# Altium PCB UpperAviPower.PcbDoc
Units mil, origin at the board's own origin, x right, y up, seen from the top; angles counter-clockwise.
Board outline 1868.64 x 1540 mil, 4 copper layers (Top Layer, GND, Layer 2, Bottom Layer), stack 23.756 mil thick; 9 components, 6 nets, 25 pads, 5 vias.
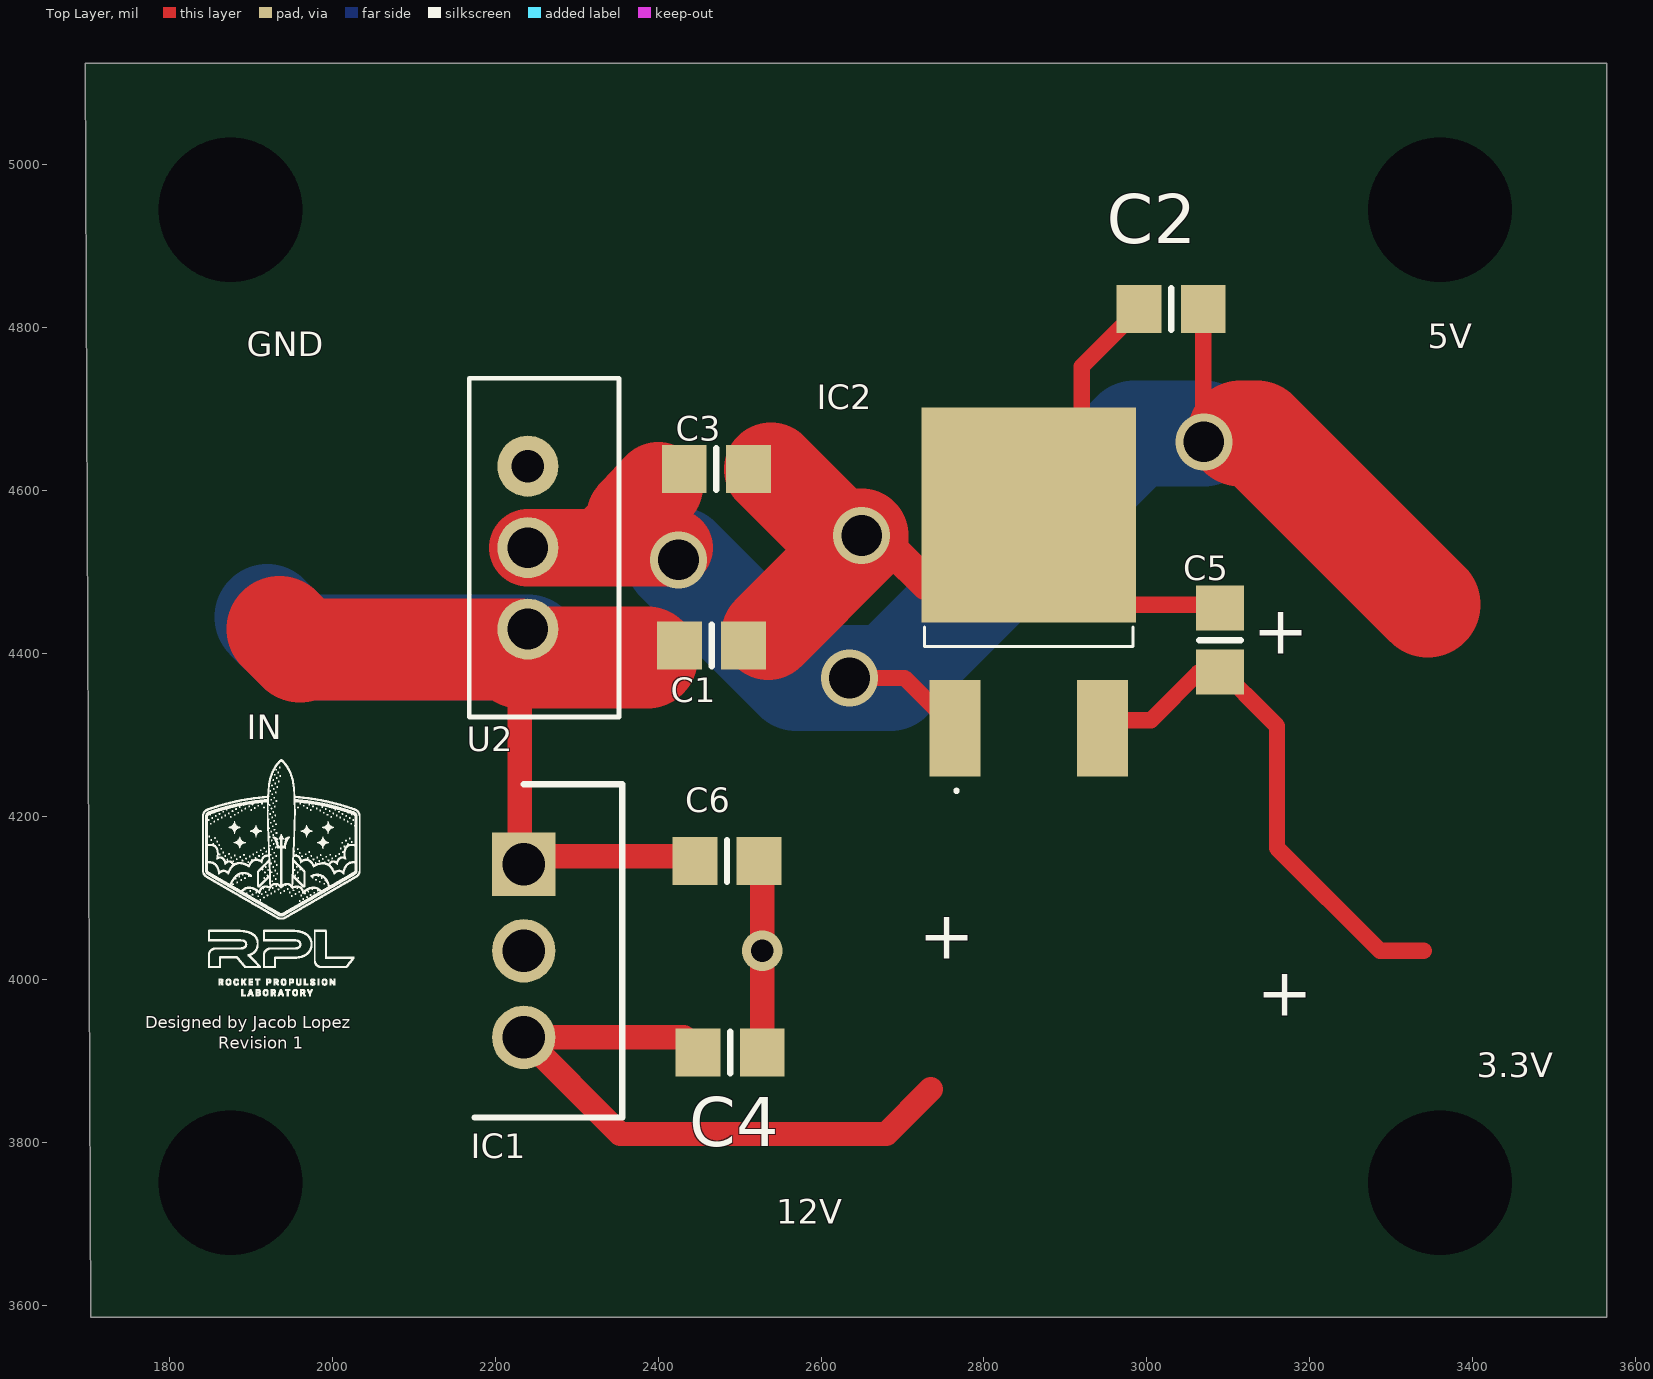
[diagram p0: Top Layer view]
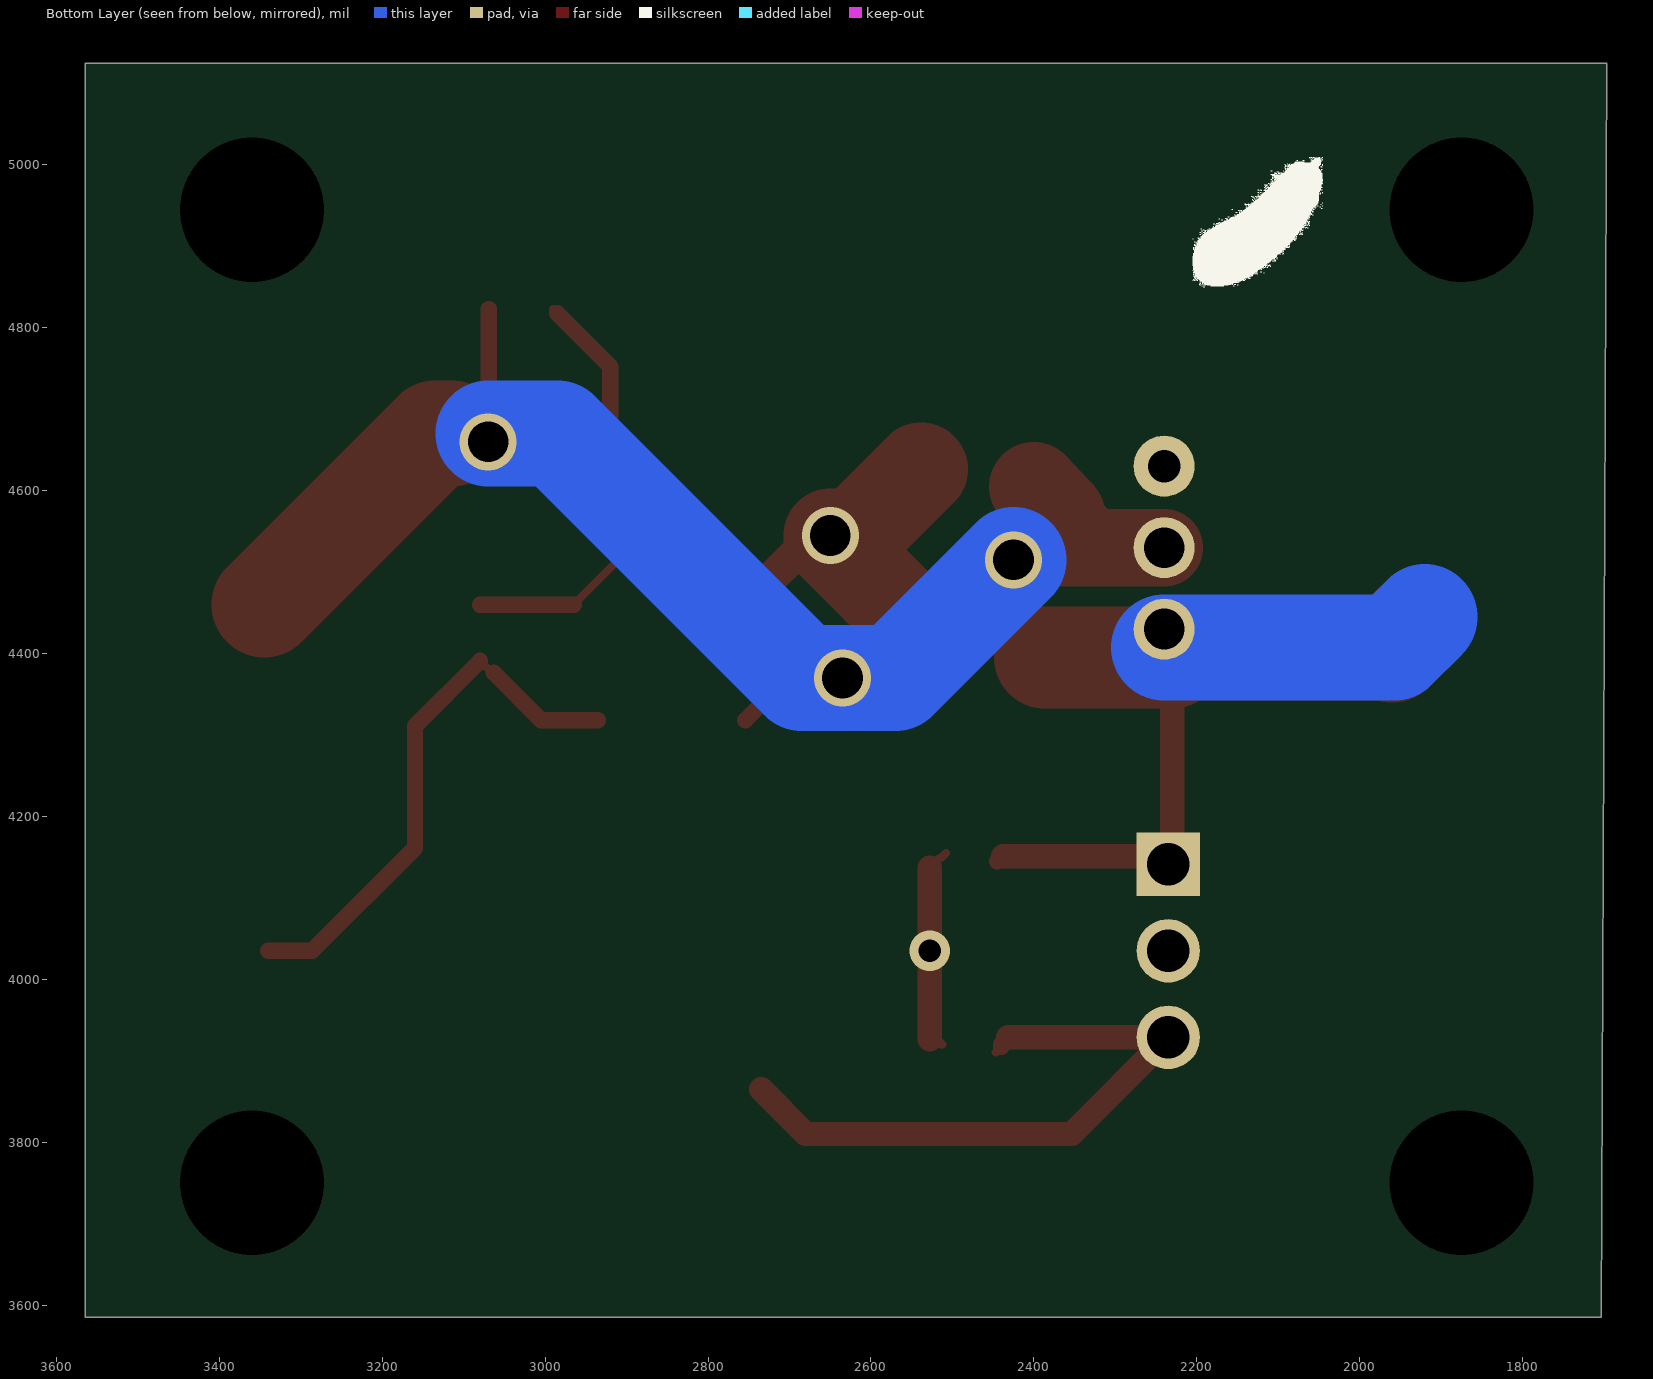
[diagram p1: Bottom Layer view, seen from below]
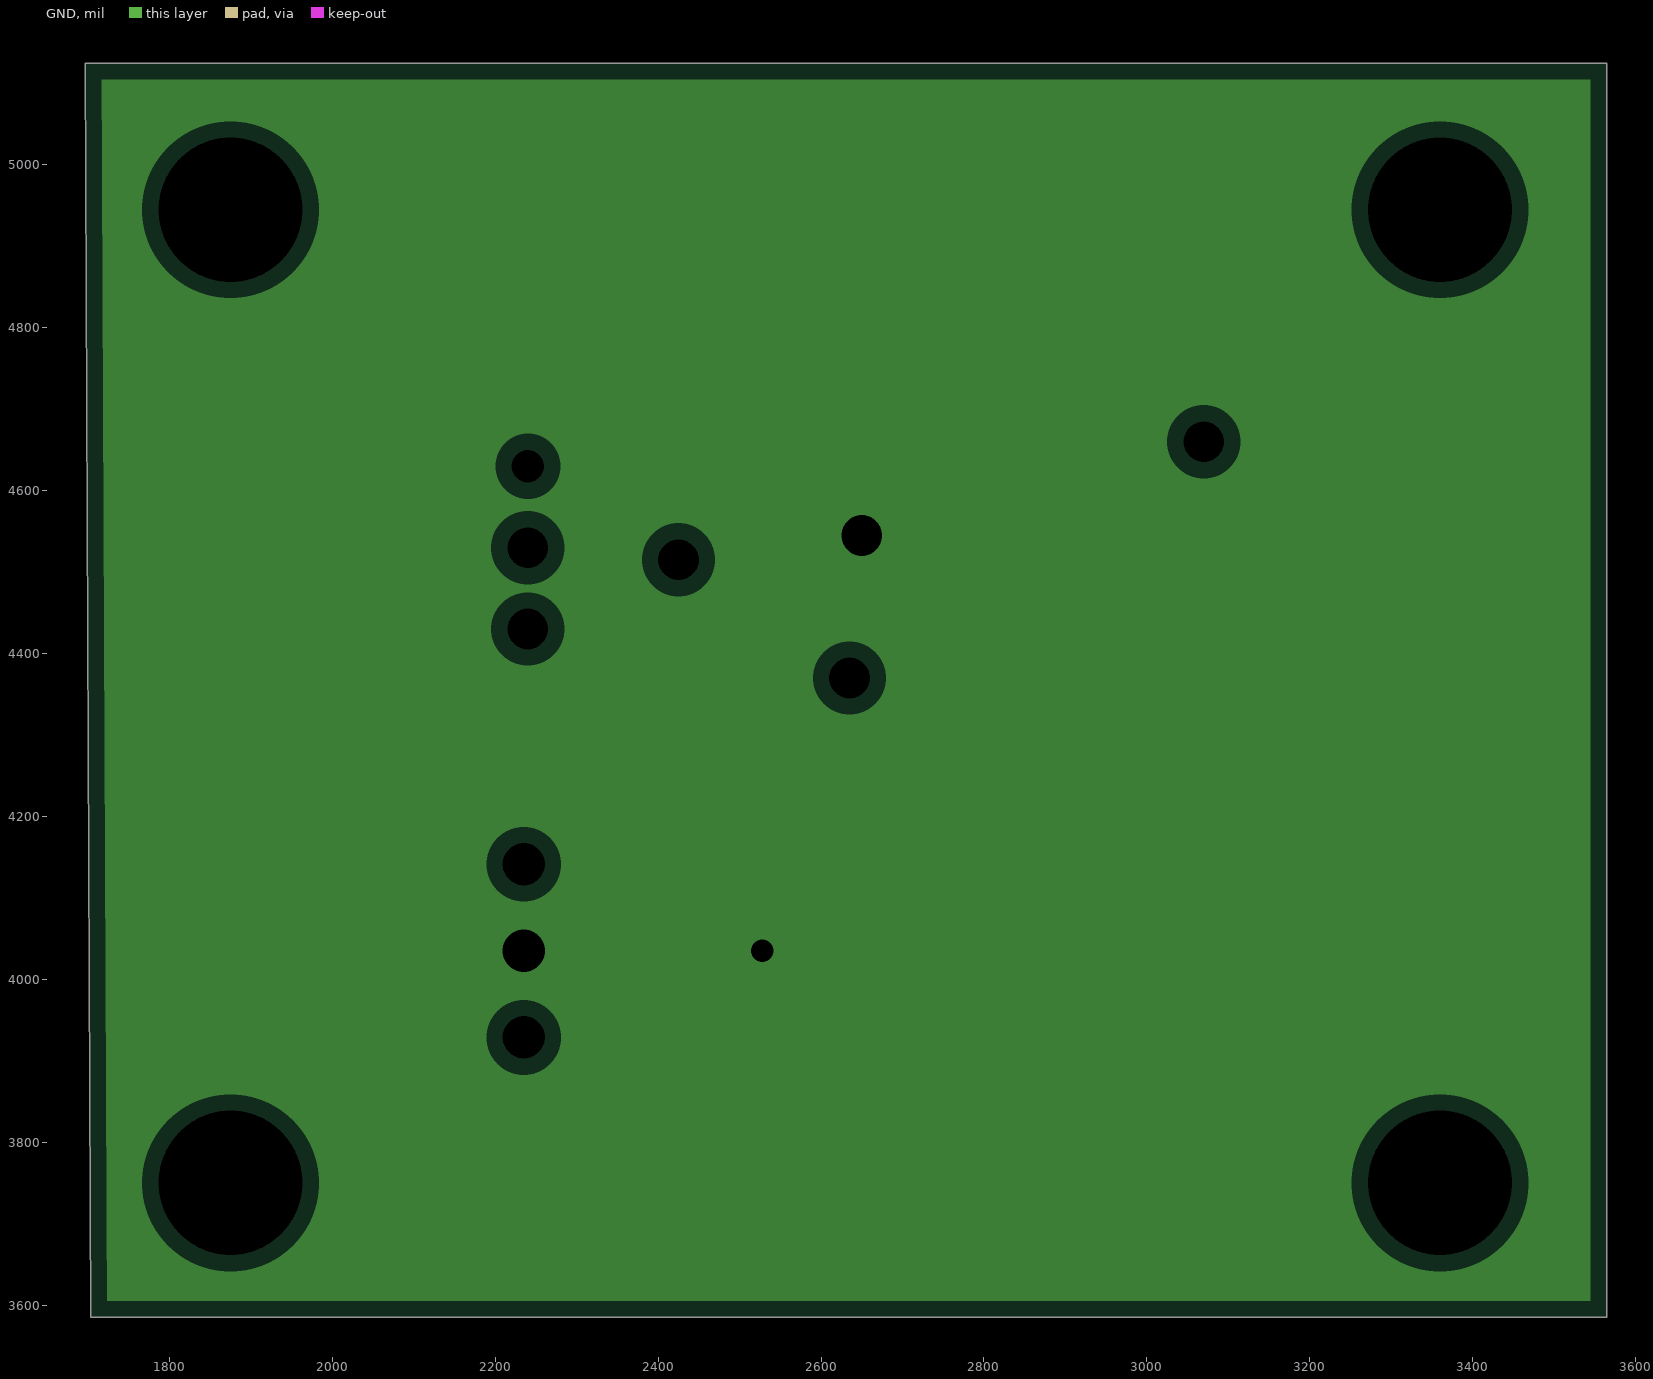
[diagram p2: GND, clearances drawn from the general rule]
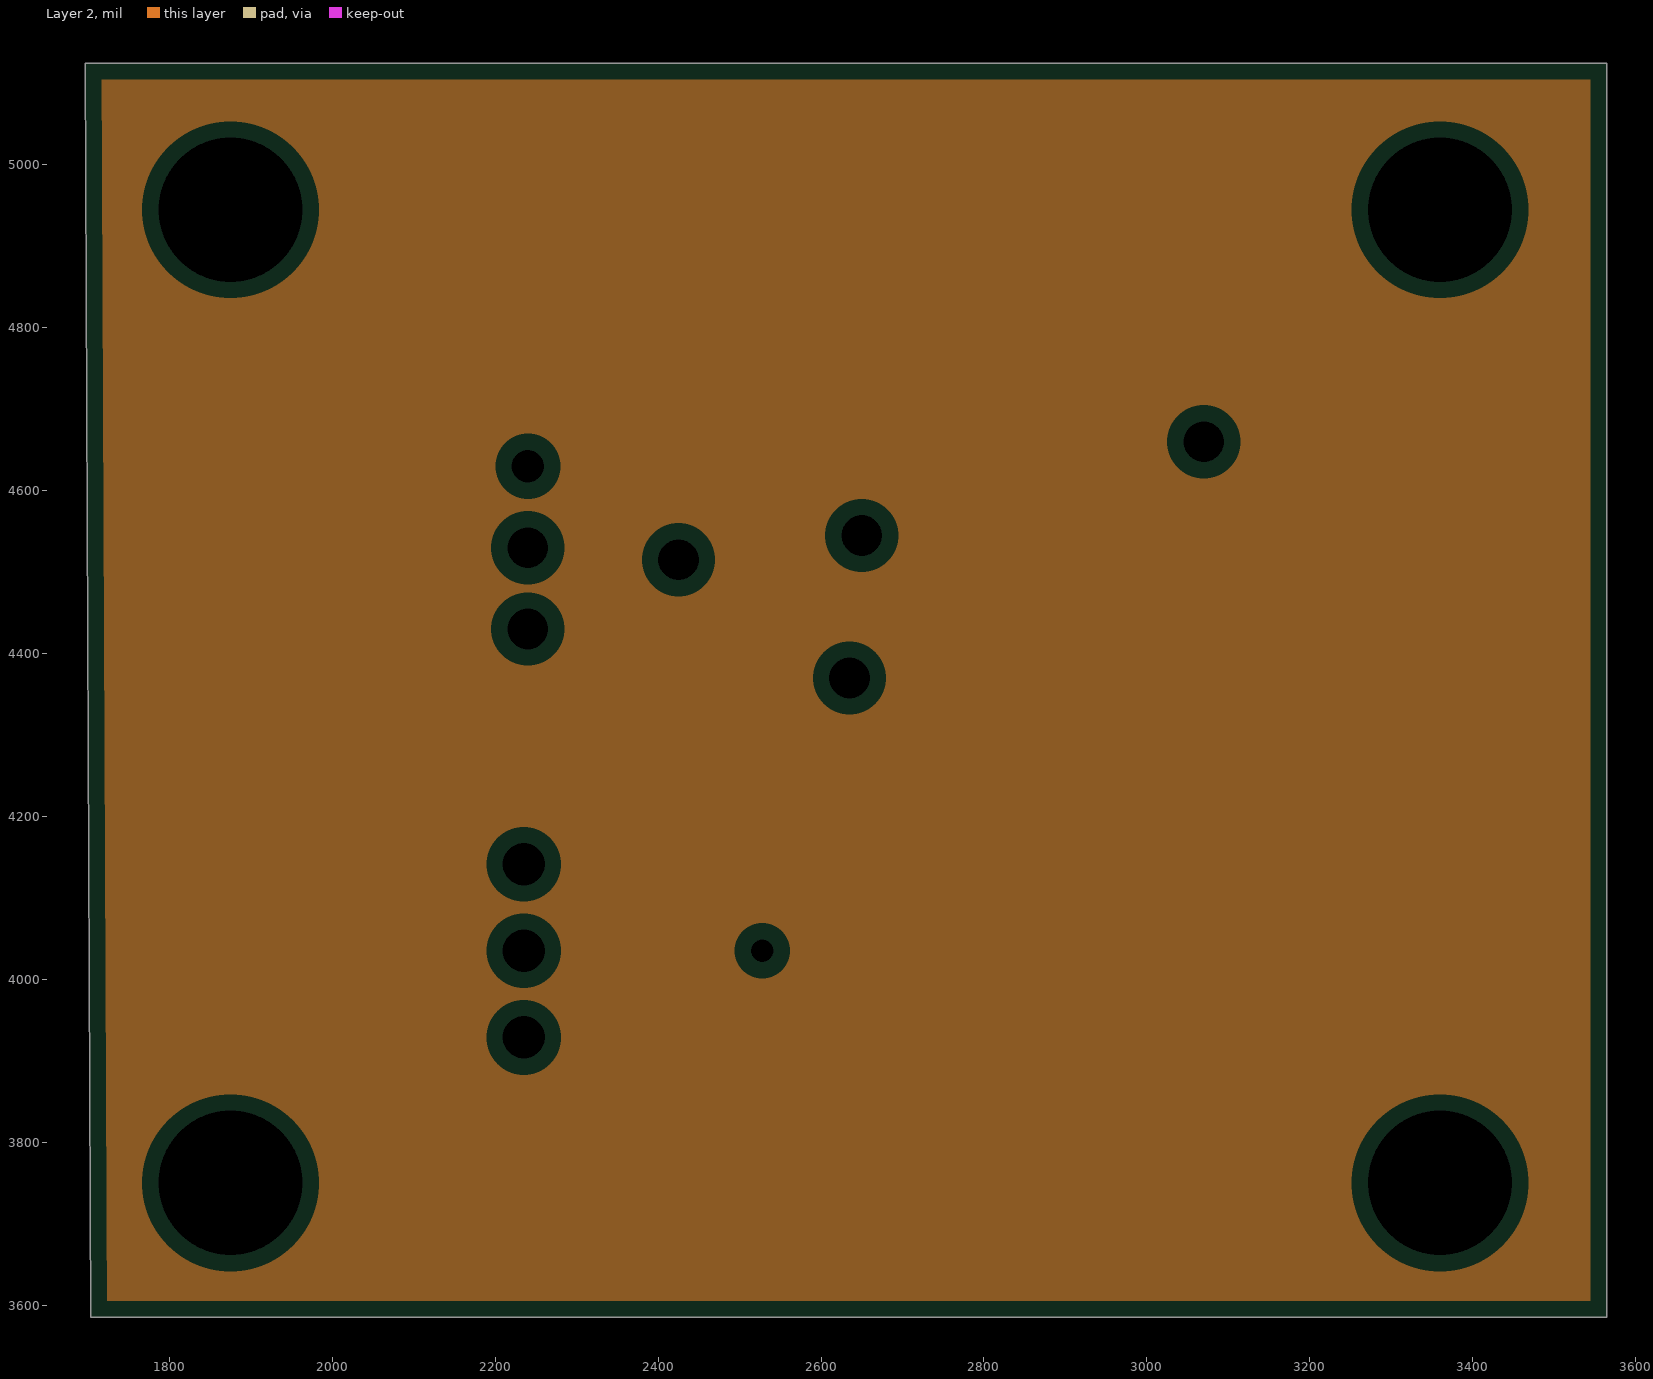
[diagram p3: Layer 2, clearances drawn from the general rule]

## Layer stack, top to bottom
Top Solder: solder mask 0.4, Solder Resist, Dk 3.5
Top Layer: signal copper 1.4
Dielectric 2: prepreg 2.8, PP-006, Dk 4.1
GND: plane copper 1.3779, net GND
Dielectric 1: dielectric 12.6, FR-4, Dk 4.8
Layer 2: plane copper 1.3779
Dielectric 3: prepreg 2.8, PP-006, Dk 4.1
Bottom Layer: signal copper 1.4
Bottom Solder: solder mask 0.4, Solder Resist, Dk 3.5

## Board outline
1696.36,5125 3565,5125 3565,3585 1703.33,3585

## Design rules (kind name [scope] priority, off if disabled: settings)
Clearance [All] p1: gap=10 ignorepadtopadclearanceinfootprint=FALSE except(0: Arc-Hole Track-Hole SMDPad-Hole THPad-Hole Via-Hole Fill-Hole Poly-Hole Region-Hole Text-Hole)
PlaneClearance [All] p1: clearance=20
PlaneConnect [All] p1: planeconnectstyle=Relief reliefexpansion=20 reliefentries=4 reliefconductorwidth=10 reliefairgap=10
PolygonConnect [All] p1: connectstyle=Relief reliefconductorwidth=10 reliefentries=4 polygonreliefangle="90 Angle" airgapwidth=10
RoutingVias [All] p1: holewidth=28 width=50 viastyle="Through Hole" minholewidth=28 minwidth=50 maxholewidth=28 maxwidth=50
SolderMaskExpansion [All] p1: expansion=4
Width [All] p1: maxlimit=200 minlimit=10 preferedwidth=10 minimp=50.000000 maximp=50.000000 favimp=50.000000
28 further rules are at their usual default settings.

## Components (designator, comment, footprint, x,y, rotation, side; value= is the part's Value field where it differs from the comment)
C1 "10uF" 6-0805_M 2465.63,4410 r0 top
C2 ".1uF" 6-0805_M 3030,4823.03 r180 top
C3 "10uF" 6-0805_M 2471.5,4626.46 r0 top
C4 ".1uF" 6-0805_M 2488.5,3910 r0 top
C5 "2.2uF" 6-0805_M 3090,4416.54 r90 top
C6 ".33uF" 6-0805_M 2484.57,4145 r0 top
IC1 "L78S12CV-12" TO270P460X1020X2008-3P 2235,4141.3 r270 top
IC2 "LF33CDT-TRY" LD1117DT33 2855,4439.09 r270 top
U2 "LM1084IT-5.0" *TO254P470X1016X2222-3P 2280,4430 r270 top

## Footprints (in the part's own frame and the unit in brackets; to place one, negate y for a bottom-side part, rotate by r counter-clockwise, add the part's x,y. Pads: shape width x height; smd on the part's side, far side on the other; paste and mask are expansions set on the pad)
6-0805_M [mm] "Chip Resistor, Body 2.0x1.2mm, IPC Low Density"
  rect 1.4x1.5 smd: 1(-1,0) 2(1,0)
  silkscreen extent 0,-0.65 0,0.65, body extent -1.07,-0.7 1.07,0.7, height 0.7
*TO254P470X1016X2222-3P [mil]
  round 75 hole 40: 1(-200,-40)
  round 75 hole 50: 2(-100,-40) 3(0,-40)
  silkscreen extent -308,-112 108,72
LD1117DT33 [mm]
  rect 3x1.6 smd: 1(3.325,-2.3) 2(3.325,2.3)
  rect 6.7x6.7 smd: 3(-3.325,0)
  silkscreen extent 0.18,-3.25 5.32,3.25
TO270P460X1020X2008-3P [mm]
  rect 1.98x1.98 hole 1.32: 1(0,0)
  round 1.98 hole 1.32: 2(2.7,0) 3(5.4,0)
  silkscreen extent -2.5,-1.53 7.9,3.07, body extent -2.4,-1.53 7.8,3.07, height 19.21

## Part data
C1 C2 C3 C4 C5 C6: library part CC0603KRX7R9BB104, "0603 0.1 uF 50 V ±10 % Tolerance X7R SMT Multilayer Ceramic Capacitor", Package="0603 Yageo", Availability=Unavailable, MF=Yageo, MP=CC0603KRX7R9BB104, Price=None, SnapEDA_Link=https://www.snapeda.com/parts/CC0603KRX7R9BB104/Yageo/view-part/?ref=snap
IC1: library part L78S12CV, "Integrated Circuit", Manufacturer_Name=STMicroelectronics, Mouser Part Number=511-L78S12CV, Datasheet Link=https://componentsearchengine.com/Datasheets/1/L78S12CV.pdf, Height=4.6mm, Manufacturer_Part_Number=L78S12CV, Mouser Price/Stock=https://www.mouser.com/Search/Refine.aspx?Keyword=511-L78S12CV
IC2: "Integrated Circuit", Manufacturer_Name=STMicroelectronics, Mouser Part Number=511-LF33CDT-TRY, Datasheet Link=https://componentsearchengine.com/Datasheets/1/LF33CDT-TRY.pdf, Height=2mm, Manufacturer_Part_Number=LF33CDT-TRY, Mouser Price/Stock=https://www.mouser.com/Search/Refine.aspx?Keyword=511-LF33CDT-TRY
U2: "Voltage stabiliser; LDO, fixed; 5V; 5A; TO220; THT; 1.2", Package="TO-220 Texas Instruments", Availability=Unavailable, MF="Texas Instruments", MP=LM1084IT-5.0/NOPB, Price=None, SnapEDA_Link=https://www.snapeda.com/parts/LM1084IT-5.0/NOPB/Texas%20Instruments/view-part/?ref=snap

## Free pads (board coordinates)
  round 60 hole 177.16: 1(1875,3750) 1(1875,4945) 1(3360,4945) 2(3360,3750)

## Via types
v1: diameter 70, hole 50, Top Layer to Bottom Layer, 4 vias
v2: diameter 50, hole 28, Top Layer to Bottom Layer, 1 vias

## Nets (pads, with @x,y where several pads share a name; then routed paths per layer and width w, separated by ;. In a path a pad name is that pad's centre, name@x,y a point inside that pad or via, vN(x,y) a via of type N, cw(c..) or ccw(c..) an arc to the next point about the centre after c; other vN are vias at no path point)
GND: C1.2 C2.2 C3.2 C4.2 C5.2 C6.2 IC1.2 IC2.3 | length 1490.8
  Top Layer w10: C3.2@2496.93,4636.46 2496.93,4651.18 C3.2@2513.58,4634.53 ; C6.2@2508.03,4155 2514,4149.04 2515.96,4149.04 C6.2@2527.87,4137.13 ; C4.2@2513.94,3920 2511.97,3920 C4.2@2523.5,3931.54 ; v1(2650,4545) 2670,4525 2690,4525 ; IC2.3@2750,4485 2845,4580 IC2.3 ; IC2.3@2920,4635 IC2.3 ; IC2.3@2965,4460 IC2.3 ; C2.2@2990.63,4821.06 C2.2
  Top Layer w20: C3.2 C3.2@2513.58,4626.46 ; C3.2@2513.58,4634.53 C3.2@2513.58,4626.46 ; 2538.54,4626.46 C3.2@2513.58,4626.46 ; IC2.3@2730,4485 IC2.3@2750,4485 ; IC2.3@2920,4635 2920,4752.4 C2.2@2985.47,4817.87 ; IC2.3@2965,4460 C5.2@3080,4460
  Top Layer w30: C4.2@2527.78,3926.54 v2(2527.78,4035) 2527.87,4087.87 C6.2@2527.87,4137.13
  Top Layer w40: 2690,4525 IC2.3@2730,4485
  Top Layer w115: 2535,4425 2650,4540 v1(2650,4545) 2620,4545 2538.54,4626.46
NetC1_1: C1.1 C6.1 IC1.1 U2.3 | length 1375.6
  Top Layer w10: 1910,4455 1920,4445 1920.52,4444.48 ; IC1.1@2225,4151.3 IC1.1@2230,4156.3 ; U2.3@2230,4395 U2.3@2230,4405 ; U2.3@2230,4410 U2.3@2230,4440 ; C6.1@2437.4,4151.3 C6.1@2441.1,4155
  Top Layer w20: C6.1@2437.4,4151.3 2438.9,4151.3 C6.1
  Top Layer w30: IC1.1@2225,4151.3 C6.1@2437.4,4151.3 ; IC1.1@2230,4156.3 U2.3@2230,4395 ; 2386.54,4395 C1.1@2416.54,4425
  Top Layer w125: 1960,4405 U2.3@2230,4405 ; U2.3@2230,4395 2386.54,4395
  Top Layer w130: 1935,4430 1960,4405
  Bottom Layer w10: IC1.1@2225,4151.3 IC1.1@2230,4156.3
  Bottom Layer w130: 1920,4445 1957.5,4407.5 U2.3@2240,4407.5
NetC2_1: C2.1 C3.1 IC2.1 U2.2 | length 1724.8
  Top Layer w20: C3.1@2432.13,4624.49 C3.1 ; v1(2635,4370) 2702.64,4370 IC2.1@2754.45,4318.19 ; v1@3069.37,4670 C2.1
  Top Layer w95: U2.2 2330,4530 ; 2366.75,4569.37 2330,4530 ; v1@2420,4530 2330,4530
  Top Layer w110: 2366.75,4569.37 2371.9,4574.89 2400,4605
  Top Layer w130: 3115,4670 3135,4670 3345,4460
  Bottom Layer w130: v1(2425,4515) 2570,4370 v1(2635,4370) 2685,4370 2985,4670 v1@3070,4670
  other v1: 3070,4660
NetC4_1: C4.1 IC1.3 | length 813.5
  Top Layer w10: C4.1@2430.35,3934.69 2430.35,3932.72 C4.1@2443.07,3920 ; C4.1@2439.9,3916.83 C4.1@2446.73,3910
  Top Layer w20: C4.1@2431.57,3928.7 2439.9,3920.37 C4.1@2439.9,3916.83
  Top Layer w30: C4.1@2431.57,3928.7 IC1.3 2353.7,3810 2680,3810 2735,3865
NetC5_1: C5.1 IC2.2 | length 671.9
  Top Layer w10: C5.1@3063.35,4376.42 3065.31,4376.42 3080,4391.1 C5.1@3080,4393.07
  Top Layer w20: IC2.2@2935.55,4318.19 3005.12,4318.19 C5.1@3063.35,4376.42 ; C5.1@3080,4391.1 3160,4311.1 3160,4161.3 3286.3,4035 3340,4035
NetJ2_2: U2.1

## Polygon pours and split planes (outlines as drawn)
GND on GND (split plane): 3544.9,5104.9 3544.9,3605.1 1723.33,3605.1 1716.54,5104.9
no net on Layer 2 (split plane): 3544.9,5104.9 3544.9,3605.1 1723.33,3605.1 1716.54,5104.9

## Silkscreen, mask and mechanical layers (free items; w line width, h text height)
Top Overlay:
  drawing of 9120 lines, arcs and shapes, not listed
  text "5V" at 3345,4775 h30
  text "GND" at 1895,4765 h30
  text "+" at 3130,4400 h60
  text "IN" at 1895,4295 h30
  text "+" at 2720,4025 h60
  text "+" at 3135,3955 h60
  text "Designed by Jacob Lopez" at 1770,3940 h15
  text "Revision 1" at 1860,3915 h15
  text "3.3V" at 3405,3880 h30
  text "12V" at 2545,3700 h30
Bottom Overlay:
  drawing of 414 lines, arcs and shapes, not listed